# Altium PCB PCB1.PcbDoc
Units mil, origin at the board's own origin, x right, y up, seen from the top; angles counter-clockwise.
Board outline 6000 x 4000 mil, 2 copper layers (Top Layer, Bottom Layer); 37 components, 26 nets, 124 pads, 2 vias.
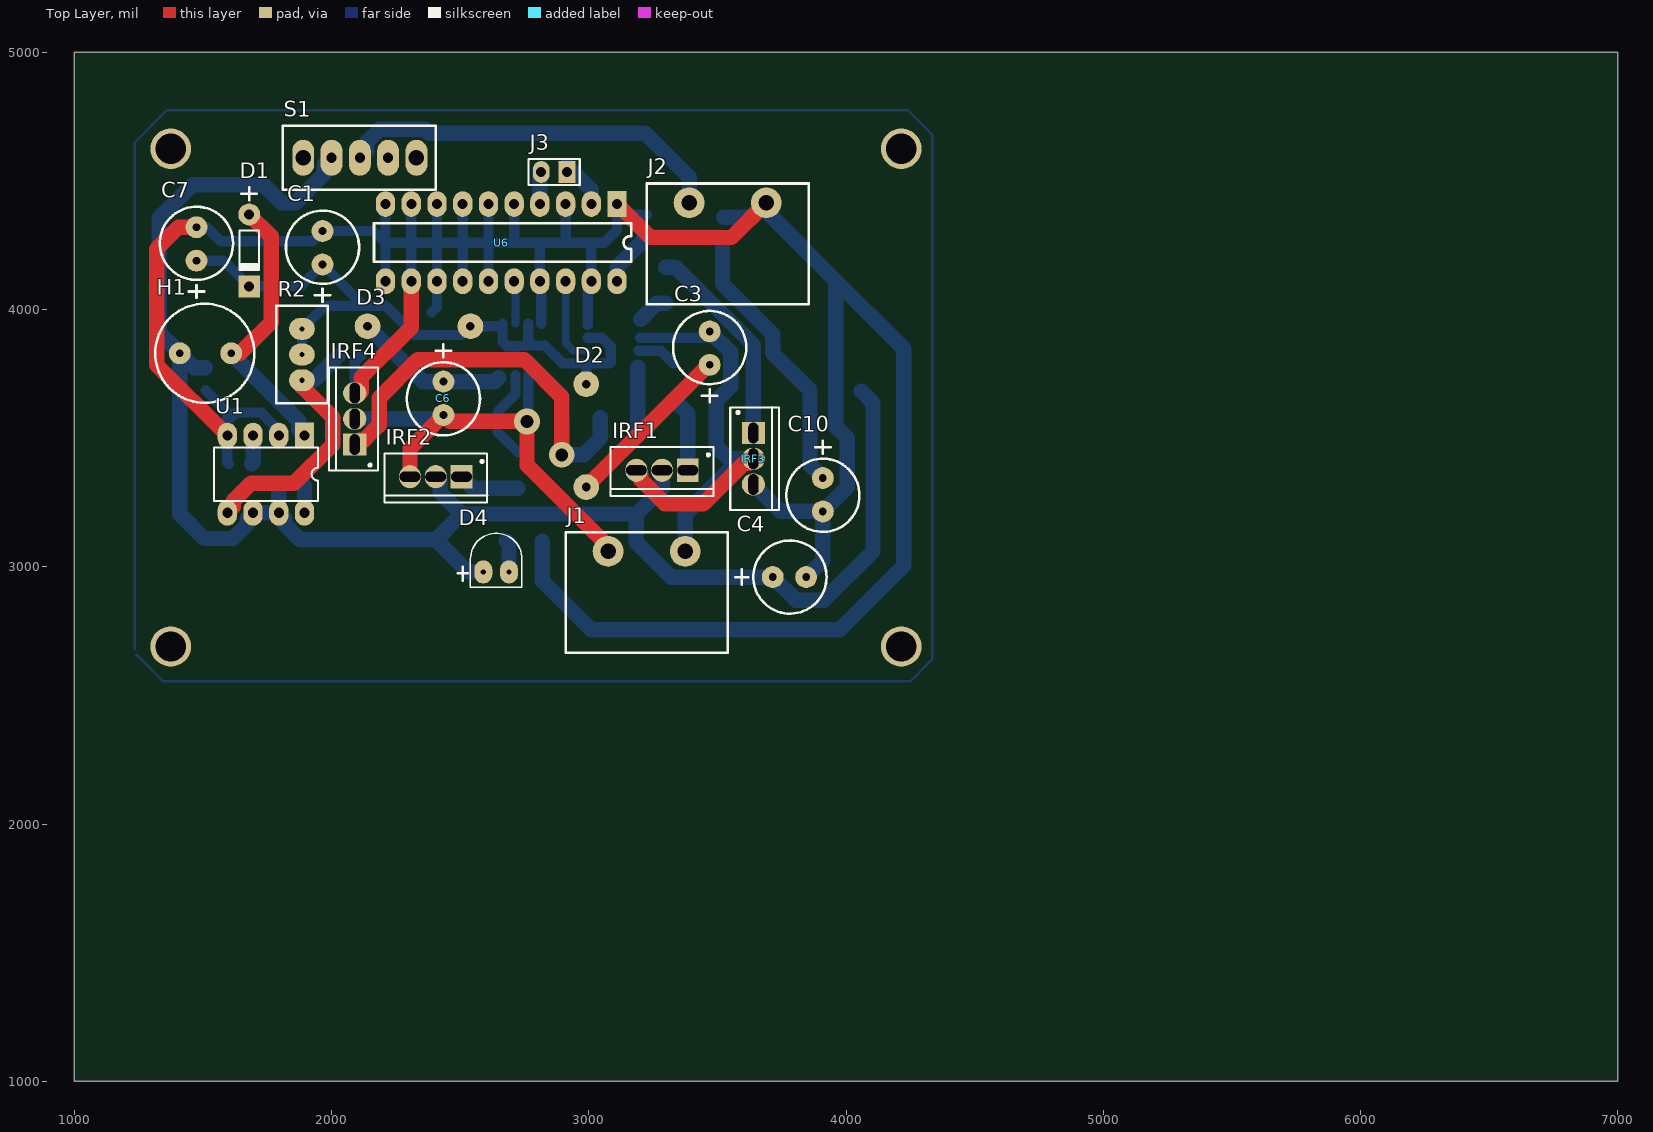
[diagram p0: Top Layer view]
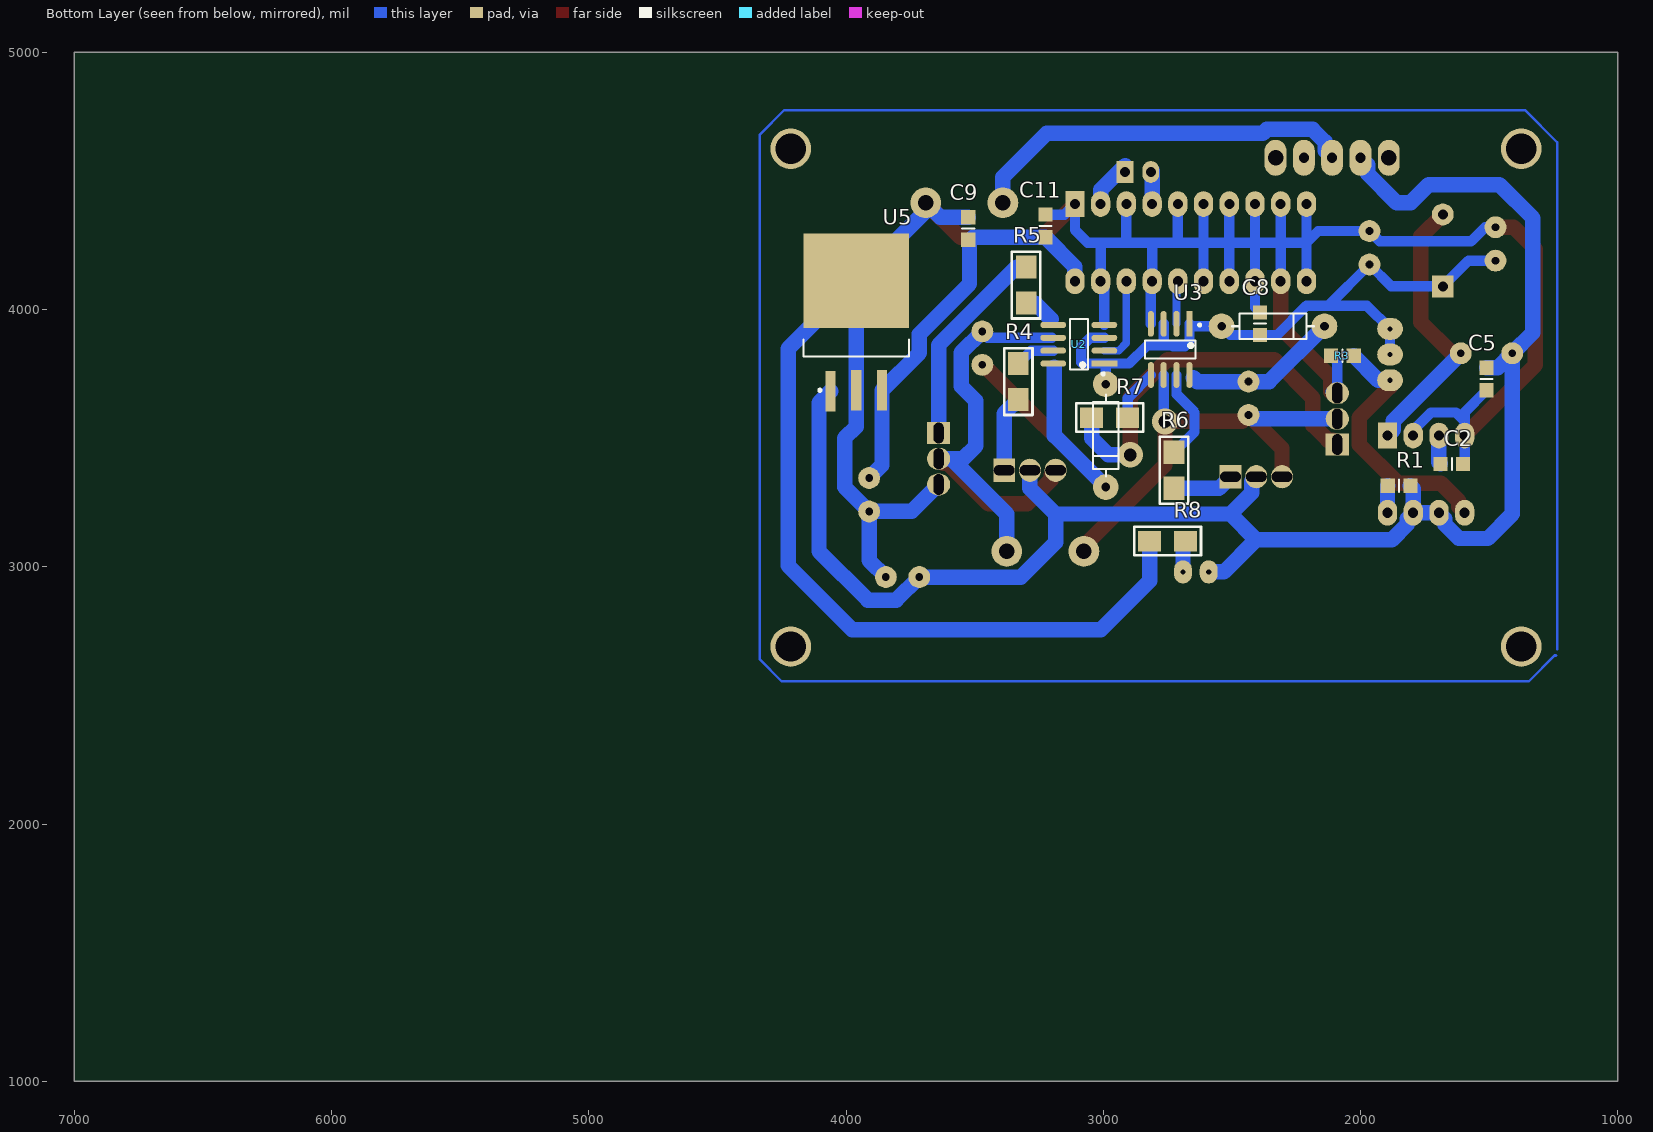
[diagram p1: Bottom Layer view, seen from below]
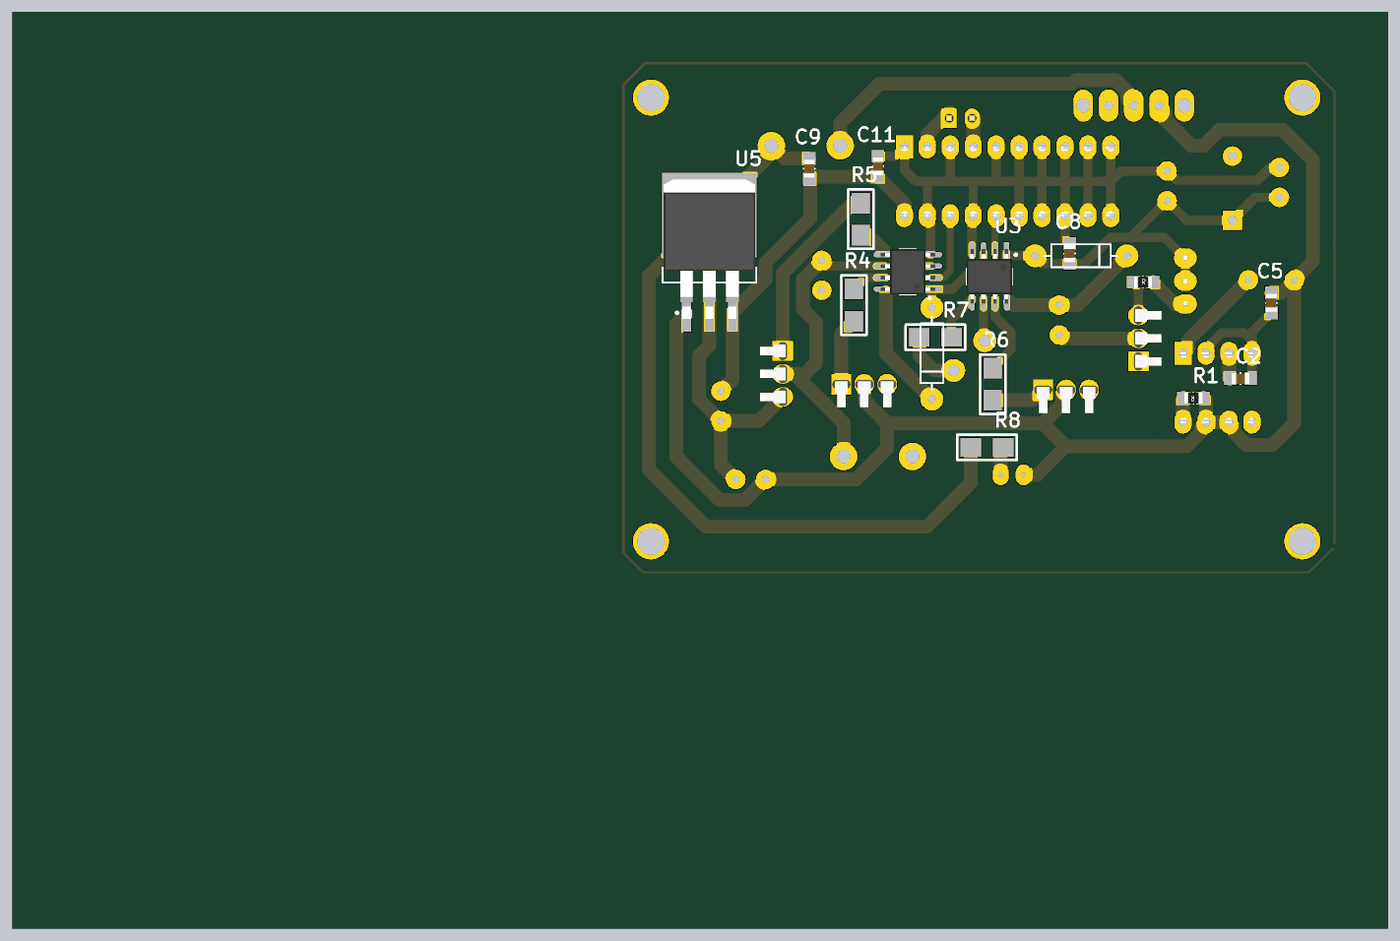
[diagram p2: 3D render of the assembled board from below, using the file's embedded part models]

## Layer stack, top to bottom
Top Solder: solder mask 0.4, Solder Resist, Dk 3.5
Top Layer: signal copper 1.4
Dielectric 1: dielectric 12.6, FR-4, Dk 4.8
Bottom Layer: signal copper 1.4
Bottom Solder: solder mask 0.4, Solder Resist, Dk 3.5

## Board outline
1000,1000 7000,1000 7000,5000 1000,5000

## Design rules (kind name [scope] priority, off if disabled: settings)
Clearance [All] p1: gap=10
PolygonConnect [All] p1: connectstyle=Relief reliefconductorwidth=10 reliefentries=4 polygonreliefangle="90 Angle" airgapwidth=10
RoutingVias [All] p1: holewidth=28 width=50 viastyle="Through Hole" minholewidth=28 minwidth=50 maxholewidth=28 maxwidth=50
SolderMaskExpansion [All] p1: expansion=4
Width [All] p1: maxlimit=60 minlimit=10 preferedwidth=60 toplayer_minwidth=60 bottomlayer_prefwidth=10 minimp=50.000000 maximp=50.000000 favimp=50.000000
29 further rules are at their usual default settings.

## Components (designator, comment, footprint, x,y, rotation, side; value= is the part's Value field where it differs from the comment)
C1 "CAP+DIP" CAP+DIP 1965,4240 r90 top
C2 "CAP-0805" CAP-0805 1645,3405 r0 bottom
C3 "CAP+DIP" CAP+DIP 3470,3850 r90 top
C4 "CAP+DIP" CAP+DIP 3780,2960 r0 top
C5 "CAP-0805" CAP-0805 1505,3730 r90 bottom
C6 "CAP+DIP" CAP+DIP 2435,3655 r270 top
C7 "CAP+DIP" CAP+DIP 1475,4255 r90 top
C8 "CAP-0805" CAP-0805 2395,3945 r270 bottom
C9 "CAP-0805" CAP-0805 3520,4315 r90 bottom
C10 "CAP+DIP" CAP+DIP 3910,3280 r270 top
C11 "CAP-0805" CAP-0805 3230,4325 r270 bottom
D1 "Diode" DIODE-DIP 1680,4235 r270 top
D2 "Diode-IN5819" Diode-IN5819 3000,3500 r270 top
D3 "Diode-IN5819" Diode-IN5819 2330,3925 r180 top
D4 "LED" LED 2640,2990 r0 top
H1 "Inductor_G" INDUCTOR-G 1410,3830 r0 top
IRF1 "IRF3205(LM-3)" LM-3 3280,3375 r180 top
IRF2 "IRF3205(LM-3)" LM-3 2400,3350 r180 top
IRF3 "IRF3205(LM-3)" LM-3 3640,3415 r270 top
IRF4 "IRF3205(LM-3)" LM-3 2090,3580 r90 top
J1 "Header-7.62" HEADER-7.5 3235,2890 r0 top
J2 "Header-7.62" HEADER-7.5 3550,4245 r0 top
J3 "Header1x2" HEADER1X2 2865,4535 r180 top
R1 "RES-0805" RES-0805 1845,3315 r0 bottom
R2 "RES-Change" RES-Change 1885,3825 r270 top
R3 "RES-0805" RES-0805 2075,3820 r180 bottom
R4 "RES" RES 3330,3720 r270 bottom
R5 "RES" RES 3300,4095 r270 bottom
R6 "RES" RES 2725,3375 r270 bottom
R7 "RES" RES 2975,3580 r180 bottom
R8 "RES" RES 2750,3100 r0 bottom
S1 "SW-2" SW-2 2110,4585 r180 top
U1 "MC34063-DIP" DIP-8 1745,3355 r270 top
U2 "IR2104" SOP-8 3095,3865 r0 bottom
U3 "IR2104" SOP-8 2740,3845 r270 bottom
U5 "LM2940(TO-263-3)" TO-263-3 3965,3925 r180 bottom
U6 "74LS244" DIP-20 2685,4260 r270 top

## Footprints (in the part's own frame and the unit in brackets; to place one, negate y for a bottom-side part, rotate by r counter-clockwise, add the part's x,y. Pads: shape width x height; smd on the part's side, far side on the other; paste and mask are expansions set on the pad)
CAP+DIP [mil]
  round 85 hole 30: 1(-65,0) 2(65,0)
  silkscreen extent -210,-142 144,142
CAP-0805 [mil]
  rect 55.12x55.12 smd: 1(-44,5) 2(44,5)
  silkscreen extent 0,-19 0,29, body extent -39,-19 39,29, height 47
DIODE-DIP [mil]
  round 85 hole 39: 1(-134.76,0)
  rect 85x85 hole 39: 2(144.76,0)
  silkscreen extent -240,-37 86,37
Diode-IN5819 [mil]
  round 100 hole 33.46: 1(-210,-10) 2(190,-10)
DIP-8 [mil]
  rect 100x75 hole 39: 1(-155,150)
  oval 100x75 hole 39: 2(-155,50) 3(-155,-50) 4(-155,-150) 5(145,-150) 6(145,-50) 7(145,50) 8(145,150)
  silkscreen extent -109,-203 99,203, body extent -160,-205 150,225, height 200
DIP-20 [mil]
  rect 100x75 hole 39: 1(-150,425)
  oval 100x75 hole 39: 2(-150,325) 3(-150,225) 4(-150,125) 5(-150,25) 6(-150,-75) 7(-150,-175) 8(-150,-275) 9(-150,-375) 10(-150,-475) 11(150,-475) 12(150,-375) 13(150,-275) 14(150,-175) 15(150,-75) 16(150,25) 17(150,125) 18(150,225) 19(150,325) 20(150,425)
  silkscreen extent -75,-520 75,480, body extent -153,-520 153,488, height 177
HEADER1X2 [mil]
  rect 65x85 hole 39: 1(-50,0)
  oval 65x85 hole 39: 2(50,0)
  silkscreen extent -100,-50 100,50, body extent -100,-50 100,50, height 352
HEADER-7.5 [mil]
  round 120 hole 60: 1(-160,170) 2(140,170)
  silkscreen extent -325,-225 305,245
INDUCTOR-G [mil]
  round 85 hole 30: 1(0,0) 2(200,0)
  silkscreen extent -95,-193 290,193
LED [mil]
  oval 70x90 hole 20: 1(-50,-10) 2(50,-10)
  silkscreen extent -150,-70 100,140
LM-3 [mil]
  rect 85x90 hole 39 slot 80 at 0 deg: 1(-105,0)
  oval 85x90 hole 39 slot 80 at 0 deg: 2(-5,0) 3(95,0)
  silkscreen extent -206,-90 195,100, body extent -205,-85 195,100, height 400
RES [mil]
  rect 90x80 smd: 1(-70,0) 2(70,0)
  silkscreen extent -130,-55 130,55
RES-0805 [mm]
  rect 1.4x1.4 smd: 1(-0.991,0) 2(1.245,0)
  silkscreen extent 0.13,-0.6 0.13,0.6, body extent -1.36,-0.7 1.64,0.7, height 0.49
RES-Change [mil]
  oval 85x100 hole 20: 1(-100,0) 2(100,0) 3(0,0)
  silkscreen extent -190,-100 190,100, body extent -188,-94 188,94, height 455
SOP-8 [mm]
  rect 2.54x0.6 smd: 1(-2.527,1.905)
  oval 2.54x0.6 smd: 2(-2.527,0.635) 3(-2.527,-0.635) 4(-2.527,-1.905) 5(2.527,-1.905) 6(2.527,-0.635) 7(2.527,0.635) 8(2.527,1.905)
  silkscreen extent -2.54,-2.5 0.89,3.05, body extent -3.02,-2.51 3.02,2.51, height 1.6
SW-2 [mil]
  oval 85x140 hole 39: 1(-110,-5) 2(0,-5) 3(110,-5)
  oval 85x140 hole 60: ""(-220,-5) ""(220,-5)
  silkscreen extent -295,-130 300,120
TO-263-3 [mil]
  rect 39.37x158 smd: 1(-95,-242.5) 2(5,-238.72) 3(105,-238.72)
  rect 411.42x368 smd: 4(5,187.5)
  silkscreen extent -200,-244 210,-42, body extent -195,-265 205,342, height 185

## Free pads (board coordinates)
  round 157.48 hole 118.11: 3(1375,2690) 3(1375,4625) 3(4215,2690) 3(4215,4625)

## Via types
v1: diameter 100, hole 50, Top Layer to Bottom Layer, 2 vias

## Nets (pads, with @x,y where several pads share a name; then routed paths per layer and width w, separated by ;. In a path a pad name is that pad's centre, name@x,y a point inside that pad or via, vN(x,y) a via of type N, cw(c..) or ccw(c..) an arc to the next point about the centre after c; other vN are vias at no path point)
5V: C9.1 C10.1 C11.2 U5.3 U6.20 | length 1602.4
  Bottom Layer w60: U6.20 3110,4166 C11.2 3505,4281 3520,4266 3520,4100 3715,3905 3715,3831.28 U5.3 3860,3395 C10.1
GND: C1.2 C2.1 C4.2 C5.1 C7.2 C8.1 C9.2 C10.2 C11.1 IRF3.3 IRF4.3 J2.2 R3.1 R8.2 U1.2 U1.4 U2.4 U3.4 U5.2 U5.4 U6.1 U6.3 U6.5 U6.6 U6.7 U6.8 U6.9 U6.10 U6.11 U6.12 U6.13 U6.14 U6.15 U6.17 U6.19 | length 12618.9
  Top Layer w60: C7.2 1405,4320 1320,4235 1320,3785 U1.4 ; IRF4.3@2115,3680 2115,3735 2310,3930 U6.12 ; U6.1 3240,4280 3555,4280 J2.2
  Bottom Layer w40: C7.2@1470,4320 C7.2 1515,4320 1570,4265 1925,4265 C1.2 2165,4305 2210,4260 ; C5.1 1595,3601 1595,3565 ; C2.1 1595,3406 U1.4 1595,3565 ; U1.2 1795,3530 1725,3600 1630,3600 1595,3565 ; IRF4.3 2090,3796 R3.1 R3.1@2115,3819 ; IRF4.3@2109.97,3680 IRF4.3@2115,3680 ; U6.11 2210,4260 ; U6.10 2210,4260 ; U6.12 2310,4260 ; U6.9 2310,4260 ; C8.1 2410,4009 U6.13 2410,4260 ; U6.8 2410,4260 ; U6.14 2510,4260 ; U6.7 2510,4260 ; U6.15 2610,4260 ; U6.6 2610,4260 ; U6.5 2710,4260 ; U3.4 2815,4105 U6.17 2810,4260 ; U6.3 2910,4265 2915,4260 ; U2.4 2995.51,4095.51 U6.19 3010,4255 3005,4260 ; C11.1 3151,4369 U6.1 3110,4310 3060,4260 3005,4260 ; 2210,4260 2310,4260 ; 2310,4260 2410,4260 ; 2410,4260 2510,4260 ; 2510,4260 2610,4260 ; 2610,4260 2710,4260 ; 2710,4260 2810,4260 ; 2810,4260 2915,4260 ; 2915,4260 3005,4260
  Bottom Layer w60: R8.2 2820,2945 3010,2755 3975,2755 4225,3005 4225,3847.5 U5.4 ; C9.2 3634,4359 J2.2 3690,4382.5 U5.4 ; IRF3.3 3745,3215 C10.2 ; C4.2 3910,3025 C10.2 ; C10.2 4005,3310 4005,3500 3960,3545 U5.2 U5.4
IN+: J2.1 S1.2 | length 1522.2
  Bottom Layer w60: S1.2 2137.5,4617.5 2137.5,4651.67 2185.83,4700 2364.17,4700 2379.17,4685 3220,4685 3390,4515 J2.1
NetC2_2: C2.2 U1.3 | length 112.5
  Bottom Layer w60: C2.2 1695,3406 U1.3
NetC3_1: C3.1 D2.2 U2.8 | length 1224.6
  Top Layer w60: D2.2 3465,3785 C3.1
  Bottom Layer w60: D2.2 3190,3510 3190,3775
NetC3_2: C3.2 IRF1.3 IRF3.2 J1.2 U2.6 | length 1960.8
  Top Layer w60: IRF1.3 3202.5,3357.5 3202.5,3338.33 3295.83,3245 3445.83,3245 3603.33,3402.5 3622.5,3402.5 IRF3.2
  Bottom Layer w40: U2.6@3199.49,3890 C3.2@3450,3890
  Bottom Layer w60: J1.2 3375,3205 3590,3420 ; C3.2 3552.5,3832.5 3552.5,3702.5 3495,3645 3495,3470 3545,3420 3590,3420 ; IRF3.2 3590,3420
NetC6_1: C6.1 D3.2 U3.8 | length 605.3
  Bottom Layer w60: D3.2 2355,3720 C6.1 2635,3720 2650,3735
NetC6_2: C6.2 IRF2.3 IRF4.2 J1.1 U3.6 | length 1767.6
  Top Layer w60: IRF2.3 2305,3460 C6.2 2460,3565 v1(2760,3565) 2760,3395 3075,3080 J1.1
  Bottom Layer w40: C6.2@2420,3575 C6.2 C6.2@2450,3605 ; 2765,3615 U3.6
  Bottom Layer w60: IRF4.2 C6.2@2420,3575
NetD1_1: D1.1 H1.2 U1.1 | length 1097.7
  Top Layer w60: H1.2 1645,3830 1765,3950 1765,4284.76 D1.1
  Bottom Layer w60: H1.2 1872.5,3567.5 1872.5,3532.5 U1.1
NetD4_2: D4.2 R8.1 | length 124.1
  Bottom Layer w60: R8.1 2690,3090 D4.2
NetIRF1_1: IRF1.1 R4.2 | length 297.8
  Bottom Layer w60: R4.2 3385,3595 IRF1.1
NetIRF2_1: IRF2.1 R6.2 | length 238.6
  Bottom Layer w60: IRF2.1 2550,3305 R6.2
NetIRF3_1: IRF3.1 R5.1 | length 807.3
  Bottom Layer w60: R5.1 3336.67,4165 3640,3861.67 IRF3.1
NetIRF4_1: IRF4.1 R7.1 | length 1544.7
  Top Layer w60: IRF4.1 2107.5,3492.5 2126.67,3492.5 2185,3550.83 2185,3655 2335,3805 2750,3805 2895,3660 v1(2895,3435)
  Bottom Layer w60: v1(2895,3435) 2980,3435 3045,3500 R7.1
NetR1_2: R1.2 U1.8 | length 105.4
  Bottom Layer w60: R1.2 1895,3314 U1.8
NetR2_2: R2.2 R3.2 U1.5 | length 1012.8
  Top Layer w60: U1.5 1617.5,3232.5 1617.5,3254.6 1687.9,3325 1855,3325 2005,3475 2005,3580 1885,3700 R2.2
  Bottom Layer w60: R2.2 1931,3725 R3.2
NetR4_1: R4.1 U2.7 | length 156.2
  Bottom Layer w40: U2.7 3280,3840 R4.1
NetR5_2: R5.2 U2.5 | length 124.1
  Bottom Layer w60: 3201.99,3961.99 3265,4025 R5.2
NetR6_1: R6.1 U3.7 | length 362.6
  Bottom Layer w40: U3.7 2715,3670 2645,3600 2645,3525 R6.1
NetR7_2: R7.2 U3.5 | length 202.8
  Bottom Layer w40: U3.5 2905,3655.51 R7.2
PWM1: J3.1 U6.2 | length 189.4
  Bottom Layer w60: J3.1@2915,4560 3010,4465 U6.2
PWM2: J3.2 U6.4 | length 137.1
  Bottom Layer w30: J3.2@2810,4540 J3.2@2815,4545
  Bottom Layer w60: U6.4 J3.2@2810,4540
PWM11: U2.2 U6.18 | length 337.9
  Bottom Layer w30: U6.18 2910,3870 2940,3840 U2.2
PWM22: U3.2 U6.16 | length 167.6
  Bottom Layer w30: U6.16 2715,4105 U3.2
VCC_7.2: C4.1 C5.2 D4.1 H1.1 IRF1.2 IRF2.2 R1.1 S1.3 U1.6 U1.7 U5.1 | length 6704.9
  Bottom Layer w60: C5.2 1466,3774 H1.1 ; R1.1 1795,3304 U1.7 ; S1.3 1972.5,4562.5 1972.5,4528.33 1859.17,4415 1805,4415 1735,4485 1460,4485 1330,4355 1330,3910 H1.1 ; IRF2.2 2422.5,3332.5 2422.5,3288.43 2505.93,3205 ; D4.1 2530.93,2980 2405.93,3105 ; IRF1.2 3285,3305 3185,3205 ; U5.1 4105,3637.5 4105,3060 3915,2870 3805,2870 C4.1 3320,2960 3185,3095 3185,3205 ; H1.1 1410,3205 1505,3110 1617.1,3110 1672.5,3165.4 1672.5,3187.5 U1.6 U1.7 ; U1.7 1817.5,3187.5 1817.5,3165.4 1877.9,3105 2405.93,3105 ; 2405.93,3105 2505.93,3205 ; 2505.93,3205 3185,3205
VCC_12: C1.1 C7.1 C8.2 D1.2 D2.1 D3.1 R2.1 R2.3 U2.1 U2.3 U3.1 U3.3 | length 2606.9
  Bottom Layer w0: 2720.51,3864.49 2735,3850
  Bottom Layer w40: C7.1 1580.24,4190 D1.2 1880.24,4090.24 C1.1 2125,4015 ; R2.3 R2.1 1975,4015 2125,4015 ; 2675.51,3864.49 2665,3875 U3.1 2655.51,3935 D3.1 2506,3901 C8.2 2324,3901 2210,4015 2125,4015 ; 2682.76,3857.24 2727.76,3857.24 ; 2745,3860 2830,3860 2900,3790 U2.1 ; 2765,3880 U3.3 ; D2.1 2990,3784.49 U2.1 ; U2.3 3050,3890 3085,3855 3085,3795 3080,3790 U2.1
pads on no net: S1. S1.1
copper on no net: | length 10372.8
  Bottom Layer w10: 1235,2680 1235,4615 1235,4650 1360,4775 4240,4775 4335,4680 4335,2640 4250,2555 1345,2555 1245,2655 1240,2655